# EAGLE board mbhp_iic_midi_v3 (EAGLE 4.16)
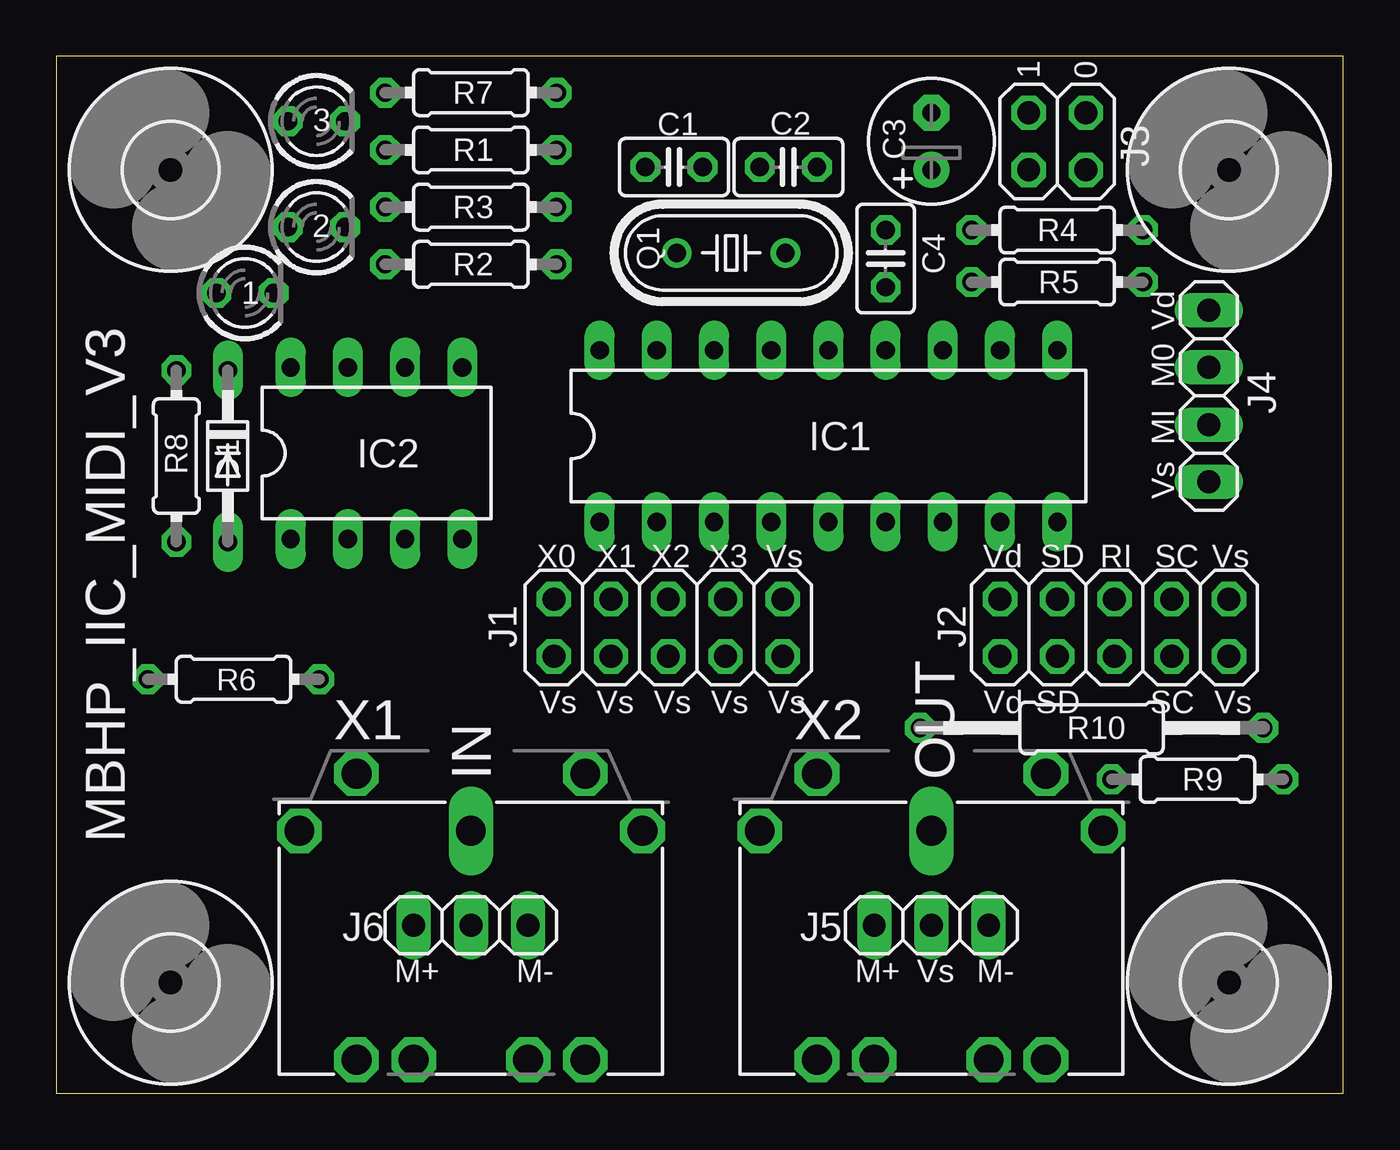
[diagram p0: board, top side]
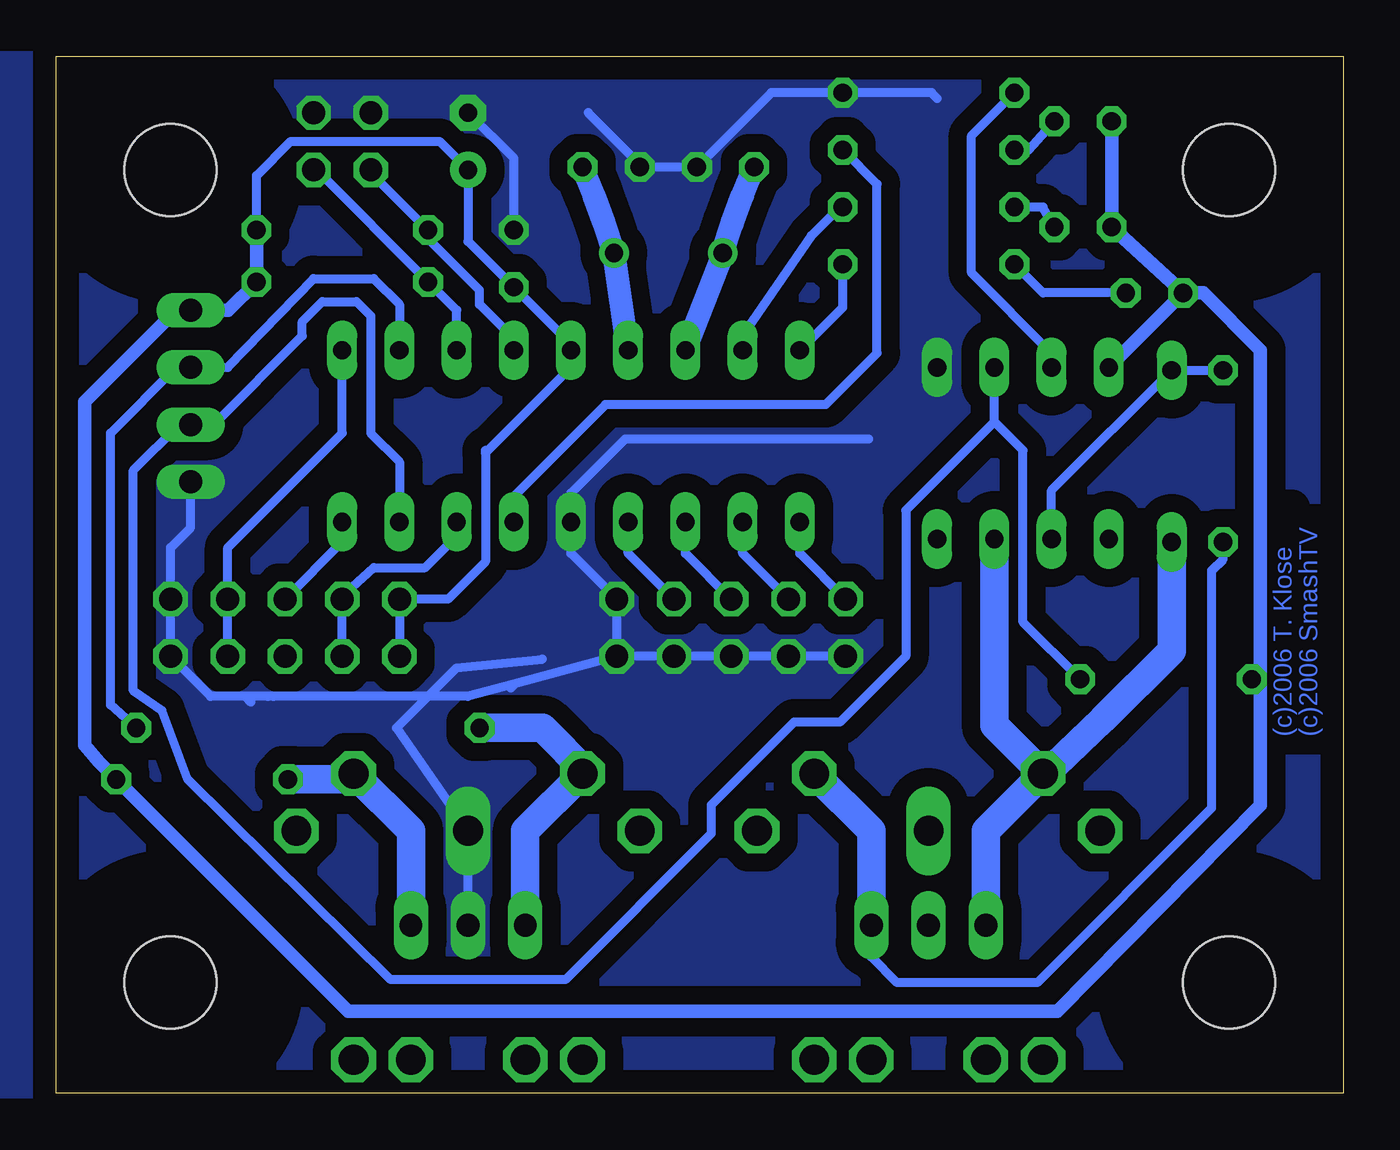
[diagram p1: board, bottom side, seen from below]

Size 57.14 x 46.03 mm. Coordinates in mm from the lower left corner, seen from the top.
Outline: 57.14,0 57.14,46.03 0,46.03 0,0 57.14,0
Copper layers (1*16): Top 0.035mm / dielectric 1.5mm / Bottom 0.035mm
Design rules "default": minimum track width 10mil, minimum drill 24mil, track to track 8mil, track to pad 8mil, pad to pad 8mil, via to via 8mil, smd to smd 8mil, copper to edge 40mil, drill to drill 8mil, minimum pad ring 10mil, minimum via ring 8mil, stop-mask expansion 4mil, vias tented up to drill 0mil, thermal gap 10mil
bRestrict: area 40.3,40 to 41.7,41.4; area 21.7,32.9 to 22.6,33.5; area 11.3,33.7 to 12.2,34.6; area 43.3,27.3 to 44.3,28.2; area 42.9,20.4 to 43.4,20.9; area 45.3,20.4 to 46.1,21; area 48,20.3 to 48.6,21; area 42.3,2.8 to 43,3.4; area 34.7,2.8 to 35.3,3.3; area 21.8,2.8 to 22.5,3.4; area 14.3,2.9 to 14.9,3.3; area 10.4,44.2 to 12.3,45.2; 1 more areas

## Footprints (pad centres in the part's own frame; a part is rotated, then mirrored left to right if it is on the bottom)
LED3MM = drill 0.813 octagon: A -1.27,0; K 1.27,0
C025-025X050 = drill 0.813 octagon: 1 -1.27,0; 2 1.27,0
E2,5-6 = drill 0.813 pad 1.6 round: + -1.27,0 | drill 0.813 pad 1.6 octagon: - 1.27,0
DO34-7 = drill 0.813 long: A 3.81,0; C -3.81,0
4,1 = hole 4.1: 0,0
DIL18 = drill 0.813 long: 1 -10.16,-3.81; 2 -7.62,-3.81; 3 -5.08,-3.81; 4 -2.54,-3.81; 5 0,-3.81; 6 2.54,-3.81; 7 5.08,-3.81; 8 7.62,-3.81; 9 10.16,-3.81; 10 10.16,3.81; 11 7.62,3.81; 12 5.08,3.81; 13 2.54,3.81; 14 0,3.81; 15 -2.54,3.81; 16 -5.08,3.81; 17 -7.62,3.81; 18 -10.16,3.81
DIL08 = drill 0.813 long: 1 -3.81,-3.81; 2 -1.27,-3.81; 3 1.27,-3.81; 4 3.81,-3.81; 5 3.81,3.81; 6 1.27,3.81; 7 -1.27,3.81; 8 -3.81,3.81
2X05 = drill 1.016 octagon: 1 -5.08,-1.27; 2 -5.08,1.27; 3 -2.54,-1.27; 4 -2.54,1.27; 5 0,-1.27; 6 0,1.27; 7 2.54,-1.27; 8 2.54,1.27; 9 5.08,-1.27; 10 5.08,1.27
2X02 = drill 1.016 octagon: 1 -1.27,-1.27; 2 -1.27,1.27; 3 1.27,-1.27; 4 1.27,1.27
1X04 = drill 1.016 long: 1 -3.81,0; 2 -1.27,0; 3 1.27,0; 4 3.81,0
1X03 = drill 1.016 long: 1 -2.54,0; 2 0,0; 3 2.54,0
HC49/S = drill 0.813 round: 1 -2.413,0; 2 2.413,0
0204/7 = drill 0.813 octagon: 1 -3.81,0; 2 3.81,0
0207/15 = drill 0.813 octagon: 1 -7.62,0; 2 7.62,0
MAB5SH = drill 1.321 octagon: 1 7.62,5.08; 3 -7.62,5.08; 4 5.08,7.62; 5 -5.08,7.62; PE -2.54,-5.08; PE1 -5.08,-5.08; PE2 5.08,-5.08; PE@ 2.54,-5.08 | drill 1.321 long: 2 0,5.08

## Placement (x,y rotation side)
1  Tx  [LED3MM]  8.38,35.52 0 top
2  Rx  [LED3MM]  11.55,38.44 0 top
3  Pwr  [LED3MM]  11.55,43.14 0 top
C1  15pF  [C025-025X050]  27.43,41.11 0 top
C2  15pF  [C025-025X050]  32.51,41.11 180 top
C3  10uF  [E2,5-6]  38.86,42.25 90 top
C4  100nF  [C025-025X050]  36.83,37.05 90 top
D1  [DO34-7]  7.61,28.28 270 top
H1  MOUNT-HOLE4.1  [4,1]  5.08,4.91 90 top
H2  MOUNT-HOLE4.1  [4,1]  5.08,40.98 90 top
H3  MOUNT-HOLE4.1  [4,1]  52.07,40.98 90 top
H4  MOUNT-HOLE4.1  [4,1]  52.07,4.91 90 top
IC1  PIC16F88  [DIL18]  34.29,29.17 0 top
IC2  6N138  [DIL08]  14.22,28.41 0 top
J1  PINHD-2X5  [2X05]  46.99,20.66 0 top
J3  [2X02]  44.45,42.25 0 top
J4  [1X04]  51.18,30.95 90 top
J5  [1X03]  38.86,7.45 180 top
J6  [1X03]  18.41,7.45 180 top
J7  PINHD-2X5  [2X05]  27.17,20.66 0 top
Q1  20MHz  [HC49/S]  29.97,37.3 180 top
R1  220  [0204/7]  18.41,41.87 180 top
R2  220  [0204/7]  18.41,36.79 180 top
R3  220  [0204/7]  18.41,39.33 180 top
R4  10k  [0204/7]  44.45,38.32 0 top
R5  10k  [0204/7]  44.45,36 180 top
R6  1.2k  [0204/7]  7.87,18.38 180 top
R7  5.6k  [0204/7]  18.41,44.41 0 top
R8  220  [0204/7]  5.33,28.28 270 top
R9  220  [0204/7]  50.67,13.93 180 top
R10  220  [0207/15]  45.97,16.22 180 top
X1  MIDI IN  [MAB5SH]  18.41,6.57 0 top
X2  MIDI OUT  [MAB5SH]  38.86,6.57 0 top

## Library data of the parts
1-3 = led
C1-C4 R1-R10 = rcl
D1 = diode
H1-H4 = holes
IC1 IC2 = ic-package
J1 J3-J7 = pinhead
Q1 = crystal
X1 X2 = con-hirschmann

## Nets
+5V: 1.A 2.A 3.A C3.+ C4.1 IC1.14 IC2.8 J1.1 J1.2 J4.4 R4.2 R5.1 R6.2 R9.1
N$1: IC1.4 J7.8
N$2: IC1.3 J7.6
N$3: IC1.2 J7.4
N$4: IC1.1 J7.2
N$5: IC1.6 R1.1
N$6: IC1.7 J1.3 J1.4
N$7: IC1.9 J1.6
N$8: IC1.10 J1.7 J1.8
N$9: IC1.8 IC2.6 J4.2 R6.1
N$10: IC1.18 R2.1
N$11: IC1.17 R3.1
N$12: C1.1 IC1.16 Q1.2
N$13: 1.K R2.2
N$14: 2.K R3.2
N$15: 3.K R1.2
N$16: IC1.13 J3.1 R4.1
N$17: IC1.12 J3.3 R5.2
N$18: IC1.11 J4.3 R10.1
N$19: IC2.7 R7.1
N$20: D1.C IC2.2 R8.1
N$21: J6.1 R8.2 X1.4
N$22: D1.A IC2.3 J6.3 X1.5
N$23: J5.1 R9.2 X2.4
N$24: J5.3 R10.2 X2.5
N$25: C2.1 IC1.15 Q1.1
VSS: C1.2 C2.2 C3.- C4.2 IC1.5 IC2.5 J1.9 J1.10 J3.2 J3.4 J4.1 J5.2 J7.1 J7.3 J7.5 J7.7 J7.9 J7.10 R7.2 X2.2

## Tracks (layer width: path | path; a pad name or v marks a point on that pad's centre or on a via)
+5V
  Bottom 0.406: J1.1 J1.2 39.75,21.93 38.08,23.6 38.08,28.42 | 38.1,28.54 38.08,28.54 38.08,28.42 | 38.08,28.42 38.1,28.41 | 38.08,28.42 34.29,32.22 IC1.14 34.29,33.24 C4.1 38.86,37.81 C3.+ 40.13,42.25 46.73,42.25 48.26,40.73 R4.2 | 3.68,12.79 3.68,18.38
  Bottom 0.61: R4.2 R5.1 49.5,34.76 J4.4 51.81,34.76 55.88,30.7 55.88,15.46 55.24,14.69 R9.1 44.19,3.64 12.7,3.64 3.68,12.79 3.68,32.98 6.22,35.52 1.A | 3.A 2.A 1.A | 1.A IC2.8 | 3.68,18.38 R6.2
N$1
  Bottom 0.406: J7.8 31.75,23.96 IC1.4
N$2
  Bottom 0.406: J7.6 29.2,23.96 IC1.3
N$3
  Bottom 0.406: J7.4 26.66,23.96 IC1.2
N$4
  Bottom 0.406: J7.2 24.12,23.96 IC1.1
N$5
  Bottom 0.406: IC1.6 36.83,26.5 32.76,30.57 22.98,30.57 20.7,32.86 20.7,40.35 R1.1
N$6
  Bottom 0.406: J1.3 J1.4 44.45,22.06 43.05,23.33 40.76,23.33 39.37,24.73 IC1.7
N$7
  Bottom 0.406: IC1.9 44.45,24.47 J1.6
N$8
  Bottom 0.406: IC1.10 44.45,29.3 49.53,24.22 J1.8 J1.7
N$9
  Bottom 0.406: 15.49,29.81 IC2.6 | 15.49,29.81 19.43,25.87 19.43,19.39 22.35,16.47 24.38,16.47 28.06,12.79 28.06,11.52 34.54,5.04 42.29,5.04 51.3,13.93 52.45,16.98 53.72,17.87 53.72,27.65 51.68,29.68 J4.2 50.16,29.68 46.22,33.62 46.22,34.25 45.33,35.14 43.81,35.14 43.18,34.51 43.18,29.3 41.91,28.03 IC1.8 | R6.1 14.22,20.92 14.22,28.54 15.49,29.81
N$10
  Bottom 0.406: IC1.18 22.22,34.89 R2.1
N$11
  Bottom 0.406: IC1.17 26.66,33.62 23.62,38.06 22.22,39.46 R3.1
N$12
  Bottom 1.016: IC1.16 27.55,37.17 Q1.2 arc6 C1.1
N$13
  Bottom 0.406: 1.K 13.33,35.52 R2.2
N$14
  Bottom 0.406: R3.2 13.33,39.33 2.K
N$15
  Bottom 0.406: R1.2 13.96,41.87 3.K
N$16
  Bottom 0.406: IC1.13 36.83,33.49 38.35,35.01 38.35,35.65 40.64,37.94 R4.1 43.18,40.86 J3.1
N$17
  Bottom 0.406: IC1.12 39.37,34.76 40.64,36.03 | 40.64,35.9 R5.2 40.64,36.03 | 40.64,36.03 45.59,40.98 J3.3
N$18
  Bottom 0.406: IC1.11 41.91,35.01 43.05,36.16 45.72,36.16 49.53,32.22 J4.3 51.81,32.22 54.73,29.3 54.73,17.23 R10.1
N$19
  Bottom 0.406: IC2.7 12.95,32.86 16.5,36.41 16.5,42.51 R7.1
N$20
  Bottom 0.406: R8.1 D1.C 12.95,26.76 IC2.2
N$21
  Bottom 0.406: J6.1 20.95,6.06 19.81,4.91 13.58,4.91 5.84,12.66 5.84,23.2 5.33,23.71 R8.2
  Bottom 1.27: X1.4 20.95,11.65 J6.1
N$22
  Bottom 0.406: J6.3 15.87,7.33 | IC2.3 15.49,24.73 | 14.16,15.01 14.22,14.95 13.33,14.06
  Bottom 1.27: J6.3 15.87,11.65 X1.5 14.16,15.01 15.49,16.34 IC2.3 | D1.A 7.61,19.65 10.66,16.6 13.33,14.06
N$23
  Bottom 0.406: X2.4 43.81,14.19
  Bottom 1.27: J5.1 41.4,11.65 X2.4 43.94,14.06 44.06,13.93 R9.2
N$24
  Bottom 0.406: X2.5 33.78,14.44
  Bottom 1.27: J5.3 36.32,11.65 X2.5 33.52,14.19 35.55,16.22 R10.2
N$25
  Bottom 1.016: IC1.15 Q1.1 arc-6 C2.1
VSS
  Bottom 0.406: 33.52,43.52 31.24,41.24 C2.2 C1.2 25.39,44.41 R7.2 18.28,44.41 18.03,44.16 | 47.49,17.61 38.86,17.61 36.84,18.16 | 47.49,17.61 47.75,17.61 | 21.08,29.04 31.87,29.04 34.29,26.63 IC1.5 34.29,23.96 J7.10 J7.9 | J5.2 X2.2 42.03,16.22 39.37,18.88 35.55,19.27 | J4.1 51.18,25.11 52.07,24.22 J1.10 J1.9 50.29,17.61 48.76,17.61 | J7.3 24.76,19.39 | J7.1 J7.3 | J7.3 J7.5 J7.7 J7.9 | J7.9 36.84,18.16 | 47.49,17.61 48.76,17.61 | C4.2 36.83,41.49 C3.- | 36.84,18.16 36.84,18.13 36.83,18.12 36.95,18 | 48.76,17.61 48.51,17.36
  pour Bottom (isolate 0.813, no thermals): -0.26,-0.04 61.97,-0.04 61.97,46.06 -0.26,46.06

## Text on the board
Bottom: (c)2006 SmashTV | (c)2006 T. Klose
tNames: 1 | 0 | Vd | M0 | MI | Vs | X0 | X1 | X2 | X3 | Vs | Vd | SD | RI | SC | Vs | J1 | J2 | Vs | Vs | Vs | Vs | Vs | Vd | SD | SC | Vs | IN | OUT | MBHP_IIC_MIDI_V3 | M+ | M- | M+ | Vs | M-